# Altium PCB PCB1.PcbDoc
Units mm, origin at the board's own origin, x right, y up, seen from the top; angles counter-clockwise.
Board outline 49 x 45 mm, 2 copper layers (Top Layer, Bottom Layer), stack 1.651 mm thick; 28 components, 43 nets, 343 pads, 51 vias.
Unrouted connection lines stored in the file: 1.
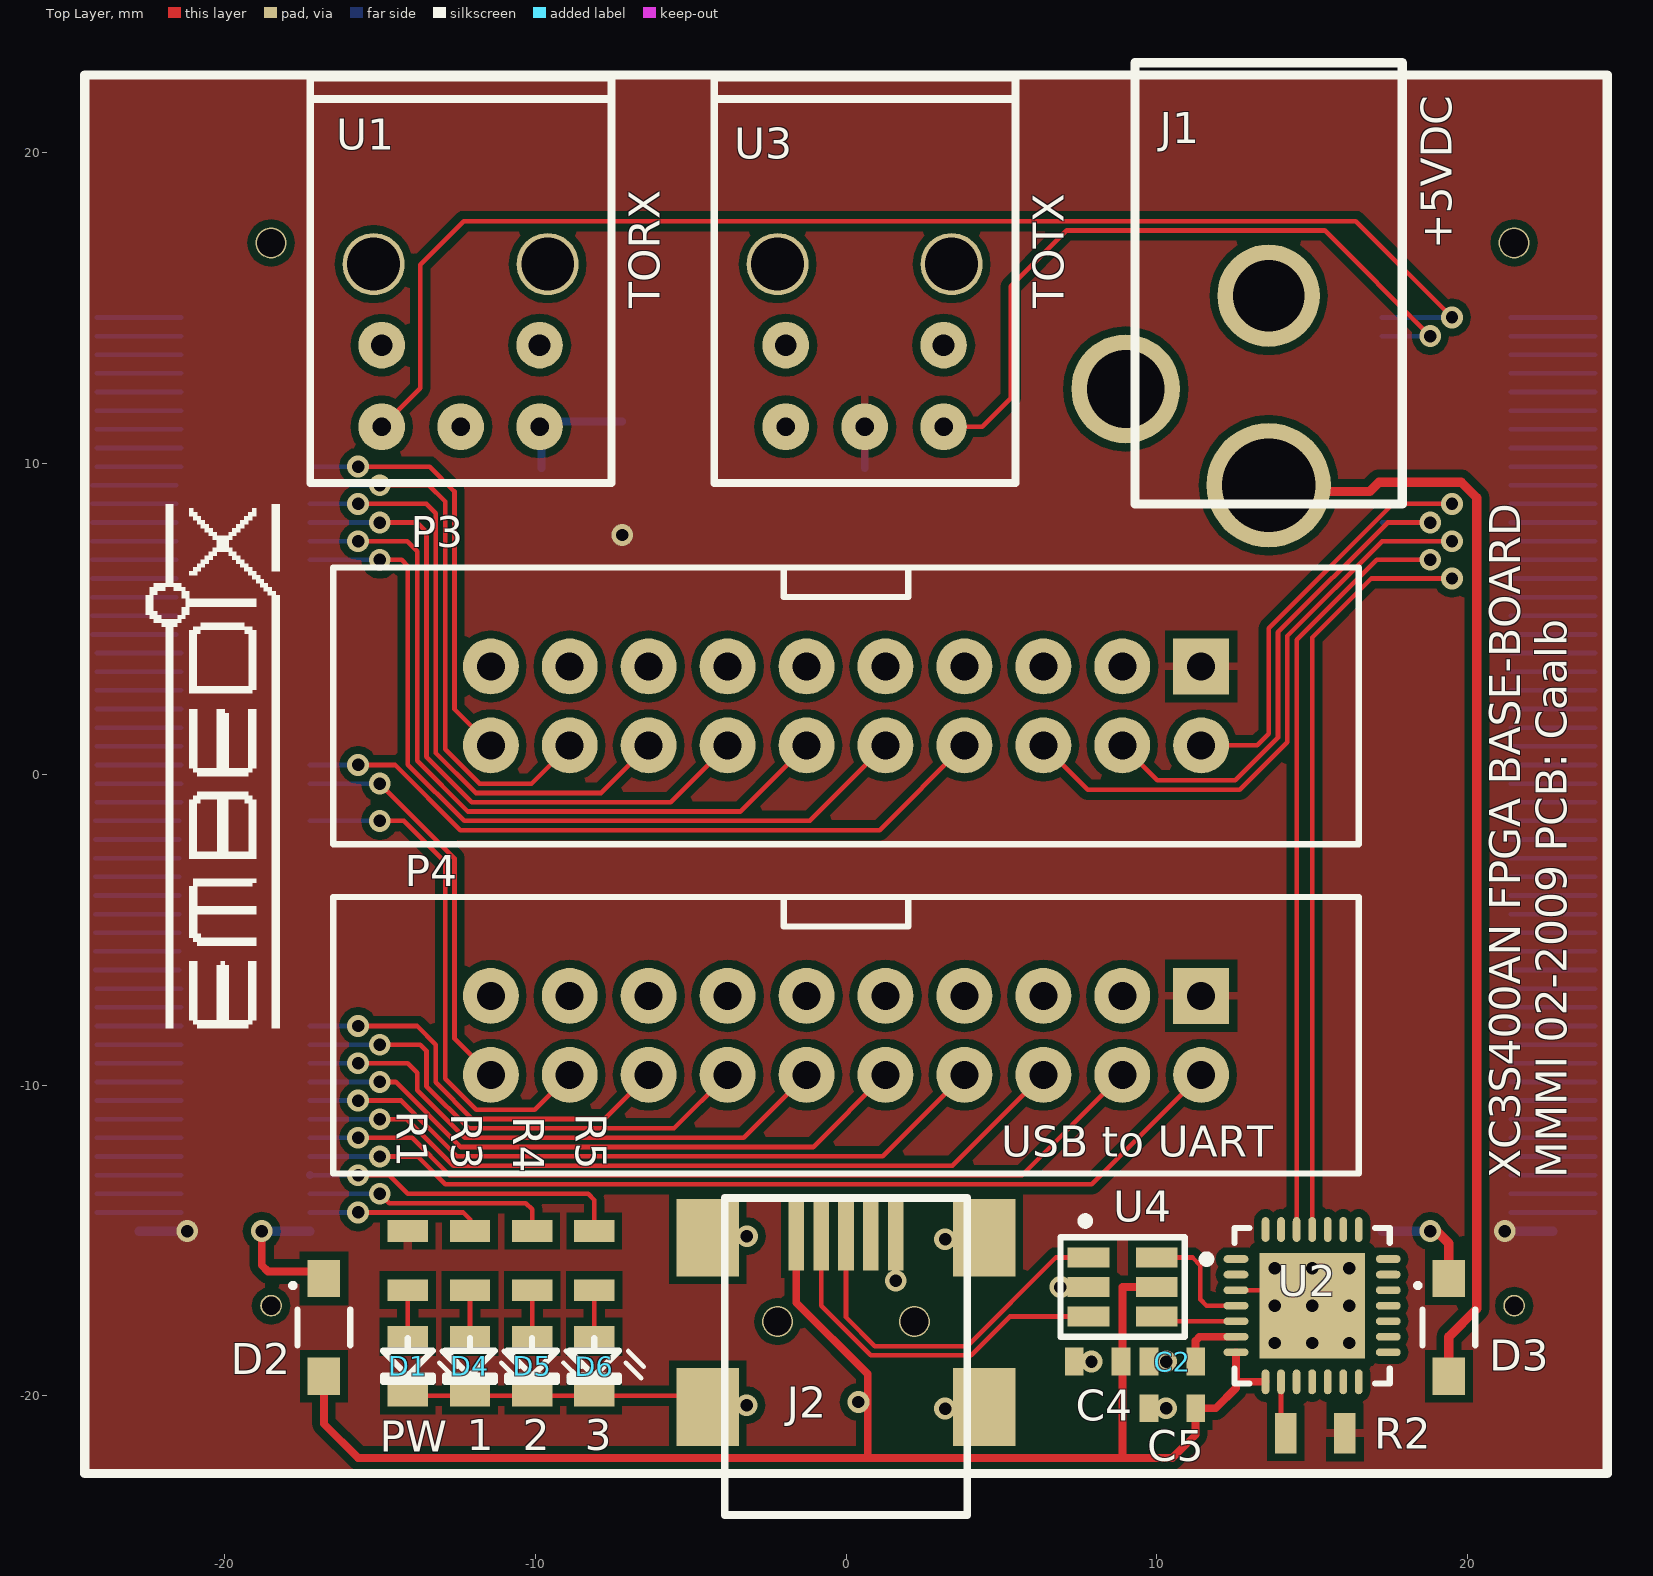
[diagram p0: Top Layer view]
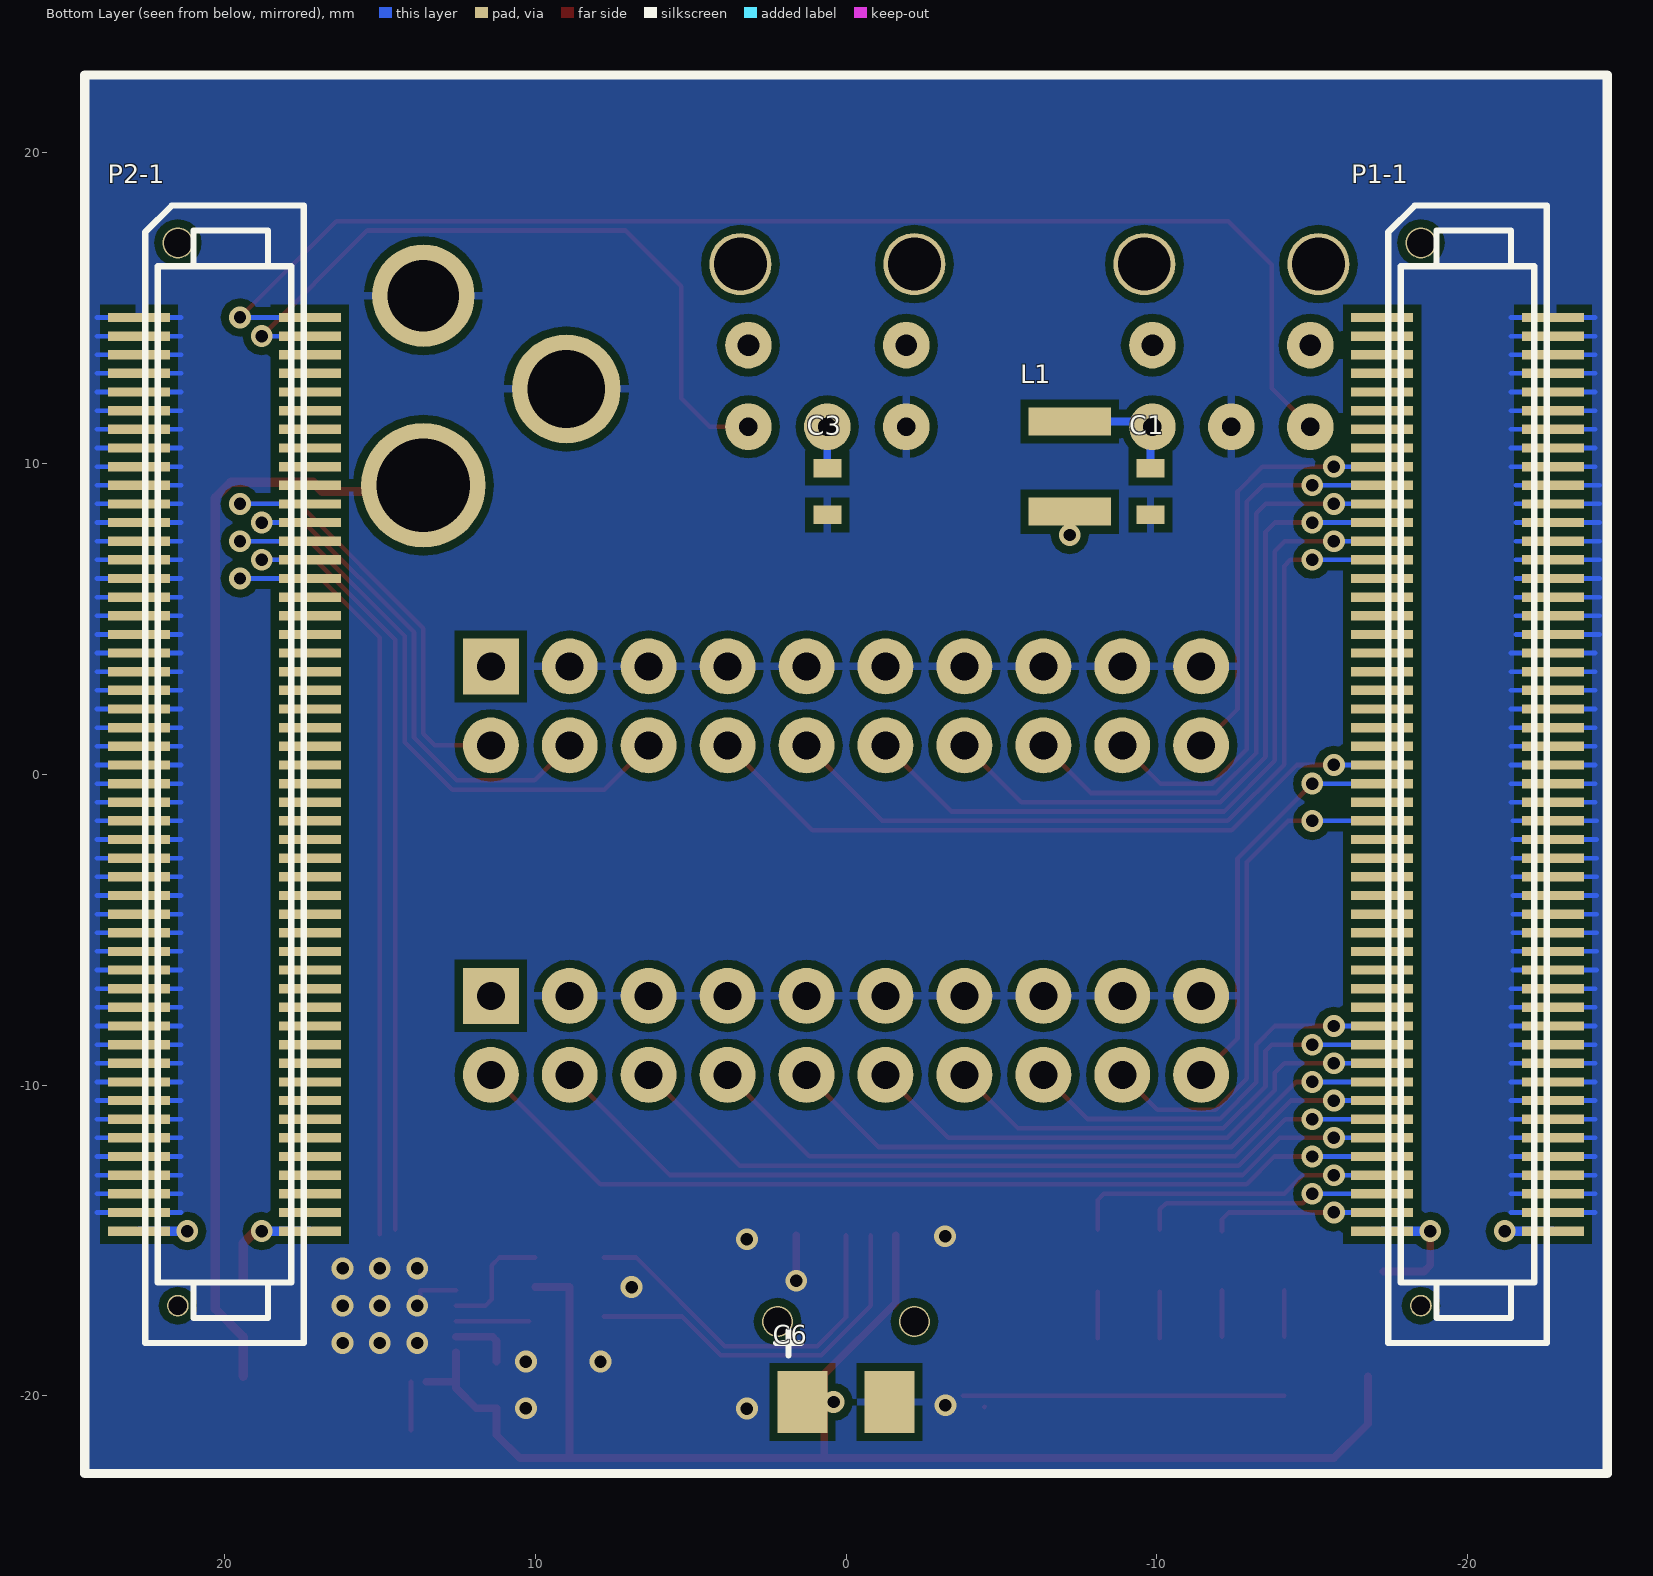
[diagram p1: Bottom Layer view, seen from below]

## Layer stack, top to bottom
Top Layer: signal copper 0.0356
Dielectric: core 1.58, FR-4, Dk 4.8
Bottom Layer: signal copper 0.0356

## Board outline
-24.5,22.5 24.5,22.5 24.5,-22.5 -24.5,-22.5

## Design rules (kind name [scope] priority, off if disabled: settings)
Clearance Clearance_1 [IsRegion] p1: gap=0.254
Clearance [all and not IsRegion] p2: gap=0.15
HoleSize [All] p1: absolutevalues=TRUE maxlimit=4 minlimit=0.025 maxpercent=80.000 minpercent=20.000
PolygonConnect PolygonConnect_1 [IsVia] p1: connectstyle=Direct reliefconductorwidth=0.254 reliefentries=2 polygonreliefangle="90 Angle"
PolygonConnect [all and not IsVia] p2: connectstyle=Relief reliefconductorwidth=0.254 reliefentries=2 polygonreliefangle="90 Angle"
RoomDefinition Sheet1 [InComponentClass('Sheet1')] p1: confinementstyle=ConfineOut formatcopy=TRUE lockcomponents=FALSE outline 25.7,-21 30.9,-21 30.9,-15.6 25.7,-15.6
RoutingVias [All] p1: holewidth=0.4 width=0.7 viastyle="Through Hole" minholewidth=0.4 minwidth=0.7 maxholewidth=0.6 maxwidth=1.2
SilkscreenOverComponentPads [All] p1: minsilkscreentomaskgap=0.254
SolderMaskExpansion [All] p1: expansion=0.102
TestPointUsage [All] p1: valid=0 allowmultiple=FALSE
Testpoint [All] p1: side=15 testpointundercomponent=TRUE minsize=1.016 maxsize=2.54 preferedsize=1.524 minholesize=0 maxholesize=1.016 preferedholesize=0.813 testpointgrid=0.025 style=1023 order=0123456789
Width [All] p1: maxlimit=0.5 minlimit=0.15 preferedwidth=0.2
22 further rules are at their usual default settings.

## Components (designator, comment, footprint, x,y, rotation, side; value= is the part's Value field where it differs from the comment)
C1 "Cap" 0603C -9.8,9.1 r90 bottom
C2 "Cap" 0603C 10.5,-18.9 r0 top
C3 "Cap" 0603C 0.6,9.1 r270 bottom
C4 "Cap" 0603C 8.1,-18.9 r0 top
C5 "Cap" 0603C 10.5,-20.4 r0 top
C6 "Tan" "TANTAL SIZE B" 0,-20.2 r180 bottom
D1 "Green" LED0805G -14.1,-19.05 r270 top
D2 "CRS08" CRS08 -16.8,-17.8 r90 top
D3 "CRS08" CRS08 19.4,-17.8 r90 top
D4 "Green" LED0805G -12.1,-19.05 r270 top
D5 "Yellow" LED0805Y -10.1,-19.05 r270 top
D6 "Red" LED0805R -8.1,-19.05 r270 top
J1 "PWR2.0" "DC FATN Ø2.0" 13.6,15.4 r180 top locked
J2 "USB mini socket" "MINI USB SMD F:1243250" 0,-17.6 r0 top locked
L1 "Inductor" 1210C -7.2,9.9 r270 bottom
P1-1 "Header 50X2" FX8C-100P-SV6(91) -20,0 r270 bottom locked
P2-1 "Header 50X2" FX8C-100P-SV6(91) 20,0 r270 bottom locked
P3 "FLAD 10X2" "HDR2X10 FLAD" 0,2.2 r180 top locked
P4 "FLAD 10X2" "HDR2X10 FLAD" 0,-8.4 r180 top locked
R1 "0805" 0805R -14.1,-15.65 r270 top
R2 "0805" 0805R 15.1,-21.2 r0 top
R3 "0805" 0805R -12.1,-15.65 r270 top
R4 "0805" 0805R -10.1,-15.65 r270 top
R5 "0805" 0805R -8.1,-15.65 r270 top
U1 "TORX147" TOTX147 -12.4,13.8 r270 top locked
U2 "CP2102" MLP-28 15,-17.1 r0 top
U3 "TOtX147" TOTX147 0.6,13.8 r270 top locked
U4 "USBLC6-2" SOT23-6 8.9,-16.5 r270 top

## Footprints (in the part's own frame and the unit in brackets; to place one, negate y for a bottom-side part, rotate by r counter-clockwise, add the part's x,y. Pads: shape width x height; smd on the part's side, far side on the other; paste and mask are expansions set on the pad)
0603C [mm]
  rect 0.6x0.9 smd mask+0.05: 1(-0.75,0) 2(0.75,0)
  body extent -0.75,-0.4 0.75,0.4, height 0.4
0805R [mm] "Resistor - MELF-R2012-0805"
  rect 0.7x1.3 smd mask+0.05: 1(-0.95,0) 2(0.95,0)
  body extent -1,-0.6 1,0.6, height 0.5
1210C [mm] "Resistor - MELF-R3216-1206"
  rect 0.9x2.64 smd: 1(-1.45,0) 2(1.45,0)
  body extent -1.5,-1.27 1.5,1.27, height 0.5
CRS08 [mm] "Molded Diode 1.5A low vf"
  rect 1.2x1.05 smd: 1(-1.575,0) 2(1.575,0)
  silkscreen extent -0.58,-0.85 1.4,1.05, body extent -1.3,-0.8 1.3,0.8, height 1
"DC FATN Ø2.0" [mm] "Lager"
  round 4 hole 3: 1(0,6.1)
  round 3.3 hole 2.3: 2(0,0)
  round 3.5 hole 2.5: 3(4.6,3)
  silkscreen extent -4.3,-7.5 4.3,6.7, body extent -4.57,-7.5 4.9,6.98, height 11.18
FX8C-100P-SV6(91) [mm] "Digi-Key Part Number H11523-ND   100pin 0.6mm pitch"
  rect 0.3x2 smd: 1(-14.7,2.75) 2(-14.7,-2.75) 3(-14.1,2.75) 4(-14.1,-2.75) 5(-13.5,2.75) 6(-13.5,-2.75) 7(-12.9,2.75) 8(-12.9,-2.75) 9(-12.3,2.75) 10(-12.3,-2.75) 11(-11.7,2.75) 12(-11.7,-2.75) 13(-11.1,2.75) 14(-11.1,-2.75) 15(-10.5,2.75) 16(-10.5,-2.75) 17(-9.9,2.75) 18(-9.9,-2.75) 19(-9.3,2.75) 20(-9.3,-2.75) 21(-8.7,2.75) 22(-8.7,-2.75) 23(-8.1,2.75) 24(-8.1,-2.75) 25(-7.5,2.75) 26(-7.5,-2.75) 27(-6.9,2.75) 28(-6.9,-2.75) 29(-6.3,2.75) 30(-6.3,-2.75) 31(-5.7,2.75) 32(-5.7,-2.75) 33(-5.1,2.75) 34(-5.1,-2.75) 35(-4.5,2.75) 36(-4.5,-2.75) 37(-3.9,2.75) 38(-3.9,-2.75) 39(-3.3,2.75) 40(-3.3,-2.75) 41(-2.7,2.75) 42(-2.7,-2.75) 43(-2.1,2.75) 44(-2.1,-2.75) 45(-1.5,2.75) 46(-1.5,-2.75) 47(-0.9,2.75) 48(-0.9,-2.75) 49(-0.3,2.75) 50(-0.3,-2.75) 51(0.3,2.75) 52(0.3,-2.75) 53(0.9,2.75) 54(0.9,-2.75) 55(1.5,2.75) 56(1.5,-2.75) 57(2.1,2.75) 58(2.1,-2.75) 59(2.7,2.75) 60(2.7,-2.75) 61(3.3,2.75) 62(3.3,-2.75) 63(3.9,2.75) 64(3.9,-2.75) 65(4.5,2.75) 66(4.5,-2.75) 67(5.1,2.75) 68(5.1,-2.75) 69(5.7,2.75) 70(5.7,-2.75) 71(6.3,2.75) 72(6.3,-2.75) 73(6.9,2.75) 74(6.9,-2.75) 75(7.5,2.75) 76(7.5,-2.75) 77(8.1,2.75) 78(8.1,-2.75) 79(8.7,2.75) 80(8.7,-2.75) 81(9.3,2.75) 82(9.3,-2.75) 83(9.9,2.75) 84(9.9,-2.75) 85(10.5,2.75) 86(10.5,-2.75) 87(11.1,2.75) 88(11.1,-2.75) 89(11.7,2.75) 90(11.7,-2.75) 91(12.3,2.75) 92(12.3,-2.75) 93(12.9,2.75) 94(12.9,-2.75) 95(13.5,2.75) 96(13.5,-2.75) 97(14.1,2.75) 98(14.1,-2.75) 99(14.7,2.75) 100(14.7,-2.75)
  round 1 hole 0.9: ""(-17.1,-1.5)
  round 0.7 hole 0.6: ""(17.1,-1.5)
  silkscreen extent -18.3,-2.55 18.3,2.55, body extent -18.3,-2.55 18.3,2.55, height 4.45
"HDR2X10 FLAD" [mm]
  rect 1.8x1.8 hole 0.9: 1(-11.43,-1.27)
  round 1.8 hole 0.9: 2(-11.43,1.27) 3(-8.89,-1.27) 4(-8.89,1.27) 5(-6.35,-1.27) 6(-6.35,1.27) 7(-3.81,-1.27) 8(-3.81,1.27) 9(-1.27,-1.27) 10(-1.27,1.27) 11(1.27,-1.27) 12(1.27,1.27) 13(3.81,-1.27) 14(3.81,1.27) 15(6.35,-1.27) 16(6.35,1.27) 17(8.89,-1.27) 18(8.89,1.27) 19(11.43,-1.27) 20(11.43,1.27)
  silkscreen extent -16.5,-4.45 16.5,4.45, body extent -16.51,-4.55 16.51,4.45, height 10
LED0805G [mm] "Resistor - MELF-R2012-0805"
  rect 0.7x1.3 smd mask+0.05: 1(-0.95,0) 2(0.95,0)
  silkscreen extent -0.9,-0.8 0.5,1.59, body extent -1,-0.6 1,0.6, height 0.8
LED0805R [mm] "Resistor - MELF-R2012-0805"
  rect 0.7x1.3 smd mask+0.05: 1(-0.95,0) 2(0.95,0)
  silkscreen extent -0.9,-0.8 0.5,1.59, body extent -1,-0.6 1,0.6, height 0.8
LED0805Y [mm] "Resistor - MELF-R2012-0805"
  rect 0.7x1.3 smd mask+0.05: 1(-0.95,0) 2(0.95,0)
  silkscreen extent -0.9,-0.8 0.5,1.59, body extent -1,-0.6 1,0.6, height 0.8
"MINI USB SMD F:1243250" [mm]
  rect 0.5x2.25 smd: 1(-1.6,2.763) 2(-0.8,2.763) 3(0,2.763) 4(0.8,2.763) 5(1.6,2.763)
  rect 2x2.5 smd: 5(-4.45,-2.762) 5(-4.45,2.688) 5(4.45,-2.762) 5(4.45,2.688)
  round 1 hole 0.9: ""(-2.2,-0.012) ""(2.2,-0.012)
  silkscreen extent -3.9,-6.24 3.9,3.96, body extent -5.35,-5.9 5.35,3.3, height 3.95
MLP-28 [mm] "QFN, 28-Leads, Body 5,0x5,0mm (max), Pitch 0,50mm, IPC Medium Density"
  oval 0.8x0.25 smd: 1(-2.45,1.5) 2(-2.45,1) 3(-2.45,0.5) 4(-2.45,0) 5(-2.45,-0.5) 6(-2.45,-1) 7(-2.45,-1.5) 15(2.45,-1.5) 16(2.45,-1) 17(2.45,-0.5) 18(2.45,0) 19(2.45,0.5) 20(2.45,1) 21(2.45,1.5)
  oval 0.25x0.8 smd: 8(-1.5,-2.45) 9(-1,-2.45) 10(-0.5,-2.45) 11(0,-2.45) 12(0.5,-2.45) 13(1,-2.45) 14(1.5,-2.45) 22(1.5,2.45) 23(1,2.45) 24(0.5,2.45) 25(0,2.45) 26(-0.5,2.45) 27(-1,2.45) 28(-1.5,2.45)
  rect 3.4x3.4 smd: 29(0,0)
  silkscreen extent -3.52,-2.5 2.5,2.5, body extent -2.5,-2.5 2.5,2.5, height 1
SOT23-6 [mm]
  rect 0.65x1.35 smd: 1(-0.95,-1.1) 2(0,-1.1) 3(0.95,-1.1) 4(0.95,1.1) 5(0,1.1) 6(-0.95,1.1)
  silkscreen extent -2.25,-2 1.6,2, body extent -1.4,-1.2 1.4,1.23, height 1.09
"TANTAL SIZE B" [mm]
  rect 1.6x2 smd: 1(-1.4,0) 2(1.4,0)
  silkscreen extent -2.25,1.5 -1.45,2.3, body extent -1.6,-0.8 1.6,0.8, height 1.61
TOTX147 [mm] "FIBER OPTIC"
  round 1.5 hole 0.6: 1(2.618,-2.54) 2(2.618,0) 3(2.618,2.54)
  round 1.5 hole 0.7: 4(-0.007,2.54) 5(-0.007,-2.54)
  round 2 hole 1.7: ""(-2.617,2.8) ""(-2.617,-2.8)
  silkscreen extent -8.63,-4.84 4.42,4.86, body extent -8.63,-4.84 4.42,4.86, height 9.5

## Part data
C1 C2 C3 C4 C5: "Capacitor"
C6: library part "Cap Pol1", "Polarized Capacitor (Radial)"
D1 D4 D5 D6: library part LED0
D2 D3: library part "Diode 11DQ03", "Schottky Rectifier"
J1: library part PWR2.5, "Low Voltage Power Supply Connector"
P1-1 P2-1: "FX8C-100S-SV(91)"
P3 P4: library part "Header 10X2", "Header, 10-Pin, Dual row"
R1 R2 R3 R4 R5: library part Res2, "Resistor"
U1: "Optic Receiving module"
U2: "USB-TO-UART BRIDGE"
U3: library part TOTX147, "Optic Transmitting module"
U4: "VERY LOW CAPACITANCE  ESD PROTECTION"

## Via types
v1: diameter 0.7, hole 0.4, Top Layer to Bottom Layer, tented both sides, 42 vias
v2: diameter 0.7, hole 0.4, Top Layer to Bottom Layer, tented top, 9 vias

## Nets (pads, with @x,y where several pads share a name; then routed paths per layer and width w, separated by ;. In a path a pad name is that pad's centre, name@x,y a point inside that pad or via, vN(x,y) a via of type N, cw(c..) or ccw(c..) an arc to the next point about the centre after c; other vN are vias at no path point)
3.3VDC: C3.1 L1.2 P1-1.99 P2-1.100 P3.1 P4.1 R1.1 R2.2 U3.2 | length 4.4
  Bottom Layer w0.25: C3.1 U3.2
  Bottom Layer w0.3: P1-1.99 v1(-21.2,-14.7) ; v1(21.2,-14.7) P2-1.100
  other v1: -7.2,7.7
GND: C1.1 C2.1 C3.2 C4.1 C5.1 C6.2 D1.2 D4.2 D5.2 D6.2 J1.2 J1.3 J2.5 P1-1.1 P1-1.3 P1-1.5 P1-1.7 P1-1.9 P1-1.11 P1-1.13 P1-1.15 P1-1.17 P1-1.19 P1-1.21 P1-1.23 P1-1.25 P1-1.27 P1-1.29 P1-1.31 P1-1.33 P1-1.35 P1-1.37 P1-1.39 P1-1.41 P1-1.43 P1-1.45 P1-1.47 P1-1.49 P1-1.51 P1-1.53 P1-1.55 P1-1.57 P1-1.59 P1-1.61 P1-1.63 P1-1.65 P1-1.67 P1-1.69 P1-1.71 P1-1.73 P1-1.75 P1-1.77 P1-1.79 P1-1.81 P1-1.83 P1-1.85 P1-1.87 P1-1.89 P1-1.91 P1-1.93 P1-1.95 P1-1.97 P2-1.2 P2-1.4 P2-1.6 P2-1.8 P2-1.10 P2-1.12 P2-1.14 P2-1.16 P2-1.18 P2-1.20 P2-1.22 P2-1.24 P2-1.26 P2-1.28 P2-1.30 P2-1.32 P2-1.34 P2-1.36 P2-1.38 P2-1.40 P2-1.42 P2-1.44 P2-1.46 P2-1.48 P2-1.50 P2-1.52 P2-1.54 P2-1.56 P2-1.58 P2-1.60 P2-1.62 P2-1.64 P2-1.66 P2-1.68 P2-1.70 P2-1.72 P2-1.74 P2-1.76 P2-1.78 P2-1.80 P2-1.82 P2-1.84 P2-1.86 P2-1.88 P2-1.90 P2-1.92 P2-1.94 P2-1.96 P2-1.98 P3.3 P3.5 P3.7 P3.9 P3.11 P3.13 P3.15 P3.17 P3.19 P4.3 P4.5 P4.7 P4.9 P4.11 P4.13 P4.15 P4.17 P4.19 U1.2 U2.3 U2.29 U3.1 U4.2 | length 281.3
  Top Layer w0.15: D1.2 D5.2 D6.2 J2.5@-3.762,-20 ; J2.5@-4.462,-20.35 J2.5@-4.45,-20.362 ; U2.3 13.7,-16.6 U2.29@13.7,-17.1
  Top Layer w0.25: v1(1.6,-16.3) J2.5@1.6,-14.837
  Bottom Layer w0.15: -24.255,4.5 -22.9,4.5 -21.55,4.5 ; -24.255,5.1 -22.9,5.1 -21.55,5.1 ; -24.255,5.7 -22.9,5.7 -21.55,5.7 ; -24.255,6.3 -22.9,6.3 -21.55,6.3 ; -24.255,6.9 -22.9,6.9 -21.55,6.9 ; -24.255,7.5 -22.9,7.5 -21.55,7.5 ; -24.255,8.1 -22.9,8.1 -21.55,8.1 ; -24.255,8.7 -22.9,8.7 -21.55,8.7 ; -24.255,9.3 -22.9,9.3 -21.55,9.3 ; -24.155,-6.3 -22.8,-6.3 -21.45,-6.3 ; -24.155,-5.7 -22.8,-5.7 -21.45,-5.7 ; -24.155,-5.1 -22.8,-5.1 -21.45,-5.1 ; -24.155,-4.5 -22.8,-4.5 -21.45,-4.5 ; -24.155,-3.9 -22.8,-3.9 -21.45,-3.9 ; -24.155,-3.3 -22.8,-3.3 -21.45,-3.3 ; -24.155,-2.7 -22.8,-2.7 -21.45,-2.7 ; -24.155,-2.1 -22.8,-2.1 -21.45,-2.1 ; -24.155,-1.5 -22.8,-1.5 -21.45,-1.5 ; -24.105,-14.1 P1-1.97 -21.4,-14.1 ; -24.105,-13.5 P1-1.95 -21.4,-13.5 ; -24.105,-12.9 P1-1.93 -21.4,-12.9 ; -24.105,-12.3 P1-1.91 -21.4,-12.3 ; -24.105,-11.7 P1-1.89 -21.4,-11.7 ; -24.105,-11.1 P1-1.87 -21.4,-11.1 ; -24.105,-10.5 P1-1.85 -21.4,-10.5 ; -24.105,-9.9 P1-1.83 -21.4,-9.9 ; -24.105,-9.3 P1-1.81 -21.4,-9.3 ; -24.105,-8.7 P1-1.79 -21.4,-8.7 ; -24.105,-8.1 P1-1.77 -21.4,-8.1 ; -24.105,-7.5 P1-1.75 -21.4,-7.5 ; -24.105,-6.9 P1-1.73 -21.4,-6.9 ; -24.105,-0.9 P1-1.53 -21.4,-0.9 ; -24.105,-0.3 P1-1.51 -21.4,-0.3 ; -24.105,0.3 P1-1.49 -21.4,0.3 ; -24.105,0.9 P1-1.47 -21.4,0.9 ; -24.105,1.5 P1-1.45 -21.4,1.5 ; -24.105,2.1 P1-1.43 -21.4,2.1 ; -24.105,2.7 P1-1.41 -21.4,2.7 ; -24.105,3.3 P1-1.39 -21.4,3.3 ; -24.105,3.9 P1-1.37 -21.4,3.9 ; -24.105,9.9 P1-1.17 -21.4,9.9 ; -24.105,10.5 P1-1.15 -21.4,10.5 ; -24.105,11.1 P1-1.13 -21.4,11.1 ; -24.105,11.7 P1-1.11 -21.4,11.7 ; -24.105,12.3 P1-1.9 -21.4,12.3 ; -24.105,12.9 P1-1.7 -21.4,12.9 ; -24.105,13.5 P1-1.5 -21.4,13.5 ; -24.105,14.1 P1-1.3 ; -24.105,14.7 P1-1.1 -21.4,14.7 ; P1-1.3 -21.4,14.1 ; 21.395,-14.1 P2-1.98 24.1,-14.1 ; 21.395,-13.5 P2-1.96 24.1,-13.5 ; 21.395,-12.9 P2-1.94 24.1,-12.9 ; 21.395,-12.3 P2-1.92 24.1,-12.3 ; 21.395,-11.1 P2-1.88 24.1,-11.1 ; 21.395,-10.5 P2-1.86 24.1,-10.5 ; 21.395,-9.9 P2-1.84 24.1,-9.9 ; 21.395,-9.3 P2-1.82 24.1,-9.3 ; 21.395,-8.7 P2-1.80 24.1,-8.7 ; 21.395,-8.1 P2-1.78 24.1,-8.1 ; 21.395,-7.5 P2-1.76 24.1,-7.5 ; 21.395,-6.9 P2-1.74 24.1,-6.9 ; 21.395,-6.3 P2-1.72 24.1,-6.3 ; 21.395,-5.7 P2-1.70 24.1,-5.7 ; 21.395,-5.1 P2-1.68 24.1,-5.1 ; 21.395,-4.5 P2-1.66 24.1,-4.5 ; 21.395,-3.9 P2-1.64 24.1,-3.9 ; 21.395,-3.3 P2-1.62 24.1,-3.3 ; 21.395,-2.7 P2-1.60 24.1,-2.7 ; 21.395,-2.1 P2-1.58 24.1,-2.1 ; 21.395,-1.5 P2-1.56 24.1,-1.5 ; 21.395,-0.9 P2-1.54 24.1,-0.9 ; 21.395,-0.3 P2-1.52 24.1,-0.3 ; 21.395,0.3 P2-1.50 24.1,0.3 ; 21.395,0.9 P2-1.48 24.1,0.9 ; 21.395,1.5 P2-1.46 24.1,1.5 ; 21.395,2.1 P2-1.44 24.1,2.1 ; 21.395,2.7 P2-1.42 24.1,2.7 ; 21.395,3.3 P2-1.40 24.1,3.3 ; 21.395,3.9 P2-1.38 24.1,3.9 ; 21.395,4.5 P2-1.36 24.1,4.5 ; 21.395,5.1 P2-1.34 24.1,5.1 ; 21.395,5.7 P2-1.32 24.1,5.7 ; 21.395,6.3 P2-1.30 24.1,6.3 ; 21.395,6.9 P2-1.28 24.1,6.9 ; 21.395,7.5 P2-1.26 24.1,7.5 ; 21.395,8.1 P2-1.24 24.1,8.1 ; 21.395,8.7 P2-1.22 24.1,8.7 ; 21.395,9.3 P2-1.20 24.1,9.3 ; 21.395,9.9 P2-1.18 24.1,9.9 ; 21.395,10.5 P2-1.16 24.1,10.5 ; 21.395,11.1 P2-1.14 24.1,11.1 ; 21.395,11.7 P2-1.12 24.1,11.7 ; 21.395,12.3 P2-1.10 24.1,12.3 ; 21.395,12.9 P2-1.8 24.1,12.9 ; 21.395,13.5 P2-1.6 24.1,13.5 ; 21.395,14.1 P2-1.4 24.1,14.1 ; 21.395,14.7 P2-1.2 24.1,14.7 ; P2-1.90 24.1,-11.7 P2-1.90 ; P2-1.90 21.395,-11.7 P2-1.90
  other v1: 3.188,-20.412 10.3,-20.4 -3.2,-20.3 7.9,-18.9 10.3,-18.9 6.9,-16.5 3.188,-14.962 -3.188,-14.862
  other v2: 13.8,-18.3 15,-18.3 16.2,-18.3 13.8,-17.1 15,-17.1 16.2,-17.1 13.8,-15.9 15,-15.9 16.2,-15.9
LED1: P1-1.98 R3.1 | length 5.6
  Top Layer w0.15: v1(-15.7,-14.1) -12.325,-14.1 -12.1,-14.325 R3.1
  Bottom Layer w0.15: P1-1.98 v1(-15.7,-14.1)
LED2: P1-1.96 R4.1 | length 8
  Top Layer w0.15: v1(-15,-13.5) -14.7,-13.8 -10.3,-13.8 -10.1,-14 R4.1@-10.1,-14.65
  Bottom Layer w0.15: P1-1.96 v1(-15,-13.5)
LED3: P1-1.94 R5.1 | length 10.4
  Top Layer w0.15: v1(-15.7,-12.9) -14.7,-12.9 -14.1,-13.5 -8.3,-13.5 -8.1,-13.7 R5.1@-8.1,-14.65
  Bottom Layer w0.15: P1-1.94 v1(-15.7,-12.9)
NetC1_2: C1.2 L1.1 U1.3 | length 4.2
  Bottom Layer w0.25: C1.2 -9.8,11.122 U1.3 ; U1.3@-9.8,11.3 -9.86,11.24 U1.3 ; L1.1 -9.692,11.35 U1.3
NetD1_1: D1.1 R1.2 | length 1.5
  Top Layer w0.15: D1.1 R1.2
NetD3_1: D3.1 J1.1 | length 35.7
  Top Layer w0.3: J1.1@13.6,9.1 16.85,9.1 17.15,9.4 19.8,9.4 20.3,8.9 20.3,-17.2 19.4,-18.1 D3.1
NetD4_1: D4.1 R3.2 | length 1.5
  Top Layer w0.15: D4.1 R3.2
NetD5_1: D5.1 R4.2 | length 1.5
  Top Layer w0.15: D5.1@-10.1,-18.15 R4.2@-10.1,-16.65
NetD6_1: D6.1 R5.2 | length 1.5
  Top Layer w0.15: D6.1@-8.1,-18.15 R5.2@-8.1,-16.65
NetJ2_2: J2.2 U4.3 | length 12
  Top Layer w0.15: J2.2 -0.8,-17.1 0.8,-18.7 4.025,-18.7 5.275,-17.45 U4.3
NetJ2_3: J2.3 U4.1 | length 12
  Top Layer w0.15: J2.3 0,-17.475 0.925,-18.4 3.9,-18.4 6.75,-15.55 U4.1
NetR2_1: R2.1 U2.9 | length 1.6
  Top Layer w0.15: R2.1@14,-21.1 U2.9
NetU2_4: U2.4 U4.6 | length 4.3
  Top Layer w0.15: U4.6@10.45,-15.55 U4.6 11.15,-15.55 11.4,-15.8 11.4,-16.9 11.6,-17.1 U2.4
NetU2_5: U2.5 U4.4 | length 2.4
  Top Layer w0.15: U4.4@10.2,-17.6 U2.5
P3_2: P2-1.21 P3.2 | length 15.5
  Top Layer w0.15: P3.2 13.23,0.93 13.6,1.3 13.6,4.699 17.601,8.7 v1(19.5,8.7)
  Bottom Layer w0.15: P2-1.21 v1(19.5,8.7)
P3_4: P2-1.23 P3.4 | length 17.4
  Top Layer w0.15: P3.4 10.015,-0.195 12.53,-0.195 13.9,1.175 13.9,4.574 17.426,8.1 v1(18.8,8.1)
  Bottom Layer w0.15: P2-1.23 v1(18.8,8.1)
P3_6: P2-1.25 P3.6 | length 21.3
  Top Layer w0.15: P3.6 7.775,-0.495 12.673,-0.495 14.2,1.032 14.2,4.45 17.25,7.5 v1(19.5,7.5)
  Bottom Layer w0.15: P2-1.25 v1(19.5,7.5)
P3_8: P1-1.50 P3.8 | length 23.1
  Top Layer w0.15: v1(-15.7,0.3) -14.512,0.3 -12.412,-1.8 1.08,-1.8 P3.8
  Bottom Layer w0.15: P1-1.50 v1(-15.7,0.3)
P3_10: P1-1.28 P3.10 | length 26.7
  Top Layer w0.15: v1(-15,6.9) -14.3,6.9 -14.1,6.7 -14.1,0.312 -12.288,-1.5 -1.16,-1.5 P3.10
  Bottom Layer w0.15: P1-1.28 v1(-15,6.9)
P3_12: P1-1.26 P3.12 | length 24.4
  Top Layer w0.15: v1(-15.7,7.5) -14.125,7.5 -13.8,7.175 -13.8,0.436 -12.164,-1.2 -3.4,-1.2 P3.12
  Bottom Layer w0.15: P1-1.26 v1(-15.7,7.5)
P3_14: P1-1.24 P3.14 | length 22.2
  Top Layer w0.15: v1(-15,8.1) -13.8,8.1 -13.5,7.8 -13.5,0.56 -12.04,-0.9 -5.64,-0.9 P3.14
  Bottom Layer w0.15: P1-1.24 v1(-15,8.1)
P3_16: P1-1.22 P3.16 | length 19.9
  Top Layer w0.15: v1(-15.7,8.7) -13.5,8.7 -13.2,8.4 -13.2,0.685 -11.915,-0.6 -7.88,-0.6 P3.16
  Bottom Layer w0.15: P1-1.22 v1(-15.7,8.7)
P3_18: P1-1.20 P3.18 | length 17.6
  Top Layer w0.15: v1@-15.1,9.377 -15.022,9.3 v1(-15,9.3) -13.422,9.3 -12.9,8.777 -12.9,0.809 -11.791,-0.3 -10.12,-0.3 P3.18
  Bottom Layer w0.15: P1-1.20 v1(-15,9.3)
P3_20: P1-1.18 P3.20 | length 13.6
  Top Layer w0.15: v1(-15.7,9.9) -13.4,9.9 -12.6,9.1 -12.6,2.1 P3.20
  Bottom Layer w0.15: P1-1.18 v1(-15.7,9.9)
P4_2: P1-1.92 P4.2 | length 30.5
  Top Layer w0.15: v1(-15,-12.3) -13.785,-12.3 -12.89,-13.195 7.905,-13.195 P4.2
  Bottom Layer w0.15: P1-1.92 v1(-15,-12.3)
P4_4: P1-1.90 P4.4 | length 28
  Top Layer w0.15: v1(-15.7,-11.7) -13.961,-11.7 -12.766,-12.895 5.665,-12.895 P4.4
  Bottom Layer w0.15: P1-1.90 v1(-15.7,-11.7)
P4_6: P1-1.88 P4.6 | length 25.4
  Top Layer w0.15: v1(-15,-11.1) -14.137,-11.1 -12.642,-12.595 3.425,-12.595 P4.6
  Bottom Layer w0.15: P1-1.88 v1(-15,-11.1)
P4_8: P1-1.86 P4.8 | length 22.9
  Top Layer w0.15: v1(-15.7,-10.5) -14.312,-10.5 -12.517,-12.295 1.185,-12.295 P4.8
  Bottom Layer w0.15: P1-1.86 v1(-15.7,-10.5)
P4_10: P1-1.84 P4.10 | length 20.4
  Top Layer w0.15: v1(-15,-9.9) -14.488,-9.9 -12.393,-11.995 -1.055,-11.995 P4.10
  Bottom Layer w0.15: P1-1.84 v1(-15,-9.9)
P4_12: P1-1.82 P4.12 | length 18.1
  Top Layer w0.15: v1(-15.7,-9.3) -14.1,-9.3 -13.8,-9.6 -13.8,-10.164 -12.269,-11.695 -3.295,-11.695 P4.12
  Bottom Layer w0.15: P1-1.82 v1(-15.7,-9.3)
P4_14: P1-1.80 P4.14 | length 15.9
  Top Layer w0.15: v1(-15,-8.7) -13.7,-8.7 -13.5,-8.9 -13.5,-10.04 -12.145,-11.395 -5.535,-11.395 P4.14
  Bottom Layer w0.15: P1-1.80 v1(-15,-8.7)
P4_16: P1-1.78 P4.16 | length 13.4
  Top Layer w0.15: v1(-15.7,-8.1) -13.8,-8.1 -13.2,-8.7 -13.2,-9.915 -12.02,-11.095 -7.775,-11.095 P4.16
  Bottom Layer w0.15: P1-1.78 v1(-15.7,-8.1)
P4_18: P1-1.56 P4.18 | length 16.8
  Top Layer w0.15: v1(-15,-1.5) -14.224,-1.5 -12.9,-2.824 -12.9,-9.791 -11.896,-10.795 -10.015,-10.795 P4.18
  Bottom Layer w0.15: P1-1.56 v1(-15,-1.5)
P4_20: P1-1.52 P4.20 | length 13.1
  Top Layer w0.15: v1(-15,-0.3) -12.6,-2.7 -12.6,-8.5 P4.20
  Bottom Layer w0.15: P1-1.52 v1(-15,-0.3)
RS232_RX: P2-1.27 U2.26 | length 25.9
  Top Layer w0.15: U2.26 14.5,4.326 17.074,6.9 v1(18.8,6.9)
  Bottom Layer w0.15: P2-1.27 v1(18.8,6.9)
RS232_TX: P2-1.29 U2.25 | length 26.7
  Top Layer w0.15: U2.25@15,-14.8 15,4.401 16.899,6.3 v1(19.5,6.3)
  Bottom Layer w0.15: P2-1.29 v1(19.5,6.3)
TORX1: P2-1.1 U1.1 | length 43
  Top Layer w0.15: U1.1 -13.7,12.422 -13.7,16.4 -12.3,17.8 16.4,17.8 v1(19.5,14.7)
  Bottom Layer w0.15: P2-1.1 v1(19.5,14.7)
TOTX1: P2-1.3 U3.3 | length 23.3
  Top Layer w0.15: U3.3 4.382,11.182 5.3,12.1 5.3,15.7 7.1,17.5 15.4,17.5 v1(18.8,14.1)
  Bottom Layer w0.15: P2-1.3 v1(18.8,14.1)
USB_VDD: C2.2 U2.6 | length 2
  Top Layer w0.25: C2.2 11.25,-18.225 11.375,-18.1 U2.6
VBUS_USB: C4.2 C5.2 C6.1 D2.1 J2.1 U2.7 U2.8 U4.5 | length 49.6
  Top Layer w0.25: D2.1 -16.8,-20.9 -15.7,-22 10.5,-22 11.25,-21.25 C5.2 11.9,-20.4 12.55,-19.75 12.55,-19.55 ; J2.1 -1.6,-17 0.7,-19.3 0.7,-22 ; 8.9,-22 8.9,-16.5 U4.5 ; U2.7 12.55,-19.55 ; U2.8 12.55,-19.55
  other v1: 0.4,-20.2
VIN: D2.2 D3.2 P1-1.100 P2-1.99 | length 7.7
  Top Layer w0.25: v1(-18.8,-14.7) -18.8,-15.8 -18.6,-16 D2.2@-17.3,-16
  Top Layer w0.3: v1(18.8,-14.7) 19,-14.7 19.4,-15.1 D3.2
  Bottom Layer w0.3: v1(-18.8,-14.7) P1-1.100 ; P2-1.99 v1(18.8,-14.7)
pads on no net: J2. J2.4 P1-1. P1-1.2 P1-1.4 P1-1.6 P1-1.8 P1-1.10 P1-1.12 P1-1.14 P1-1.16 P1-1.30 P1-1.32 P1-1.34 P1-1.36 P1-1.38 P1-1.40 P1-1.42 P1-1.44 P1-1.46 P1-1.48 P1-1.54 P1-1.58 P1-1.60 P1-1.62 P1-1.64 P1-1.66 P1-1.68 P1-1.70 P1-1.72 P1-1.74 P1-1.76 P2-1. P2-1.5 P2-1.7 P2-1.9 P2-1.11 P2-1.13 P2-1.15 P2-1.17 P2-1.19 P2-1.31 P2-1.33 P2-1.35 P2-1.37 P2-1.39 P2-1.41 P2-1.43 P2-1.45 P2-1.47 P2-1.49 P2-1.51 P2-1.53 P2-1.55 P2-1.57 P2-1.59 P2-1.61 P2-1.63 P2-1.65 P2-1.67 P2-1.69 P2-1.71 P2-1.73 P2-1.75 P2-1.77 P2-1.79 P2-1.81 P2-1.83 P2-1.85 P2-1.87 P2-1.89 P2-1.91 P2-1.93 P2-1.95 P2-1.97 U1. U1.4 U1.5 U2.1 U2.2 U2.10 U2.11 U2.12 U2.13 U2.14 U2.15 U2.16 U2.17 U2.18 U2.19 U2.20 U2.21 U2.22 U2.23 U2.24 U2.27 U2.28 U3. U3.4 U3.5

## Polygon pours and split planes (outlines as drawn)
3.3VDC on Top Layer "3.3VDC TOP" (solid, remove dead copper, pour order 1000): -24.5,22.5 24.5,22.5 24.5,-22.5 -24.5,-22.5 -24.5,22.5
GND on Bottom Layer "GND" (solid, remove dead copper, pour order 1001): -24.5,22.5 24.5,22.5 24.5,-22.5 -24.5,-22.5

## Silkscreen, mask and mechanical layers (free items; w line width, h text height)
Top Overlay:
  drawing of 12 lines, arcs and shapes, not listed
  text "+5VDC" at 19.5,16.9 h1 r90
  text "TORX" at -6,15 h1 r90
  text "TOTX" at 7,15 h1 r90
  text "USB to UART" at 5,-12.3 h1
  text "XC3S400AN FPGA BASE-BOARD" at 21.7,-13 h1 r90
  text "MMMI 02-2009 PCB: Caalb" at 23.2,-13 h1 r90
  text "1" at -12.2,-21.75 h1
  text "2" at -10.4,-21.75 h1
  text "3" at -8.4,-21.75 h1
  text "PW" at -15,-21.8 h1
Bottom Overlay:
  the board outline again, w0.3
Mechanical 1:
  lines w0.3: -24.5,-22.5 -24.5,22.5 24.5,22.5 24.5,-22.5